# Altium PCB EMG_MainBoard_Layout.PcbDoc (part 4 of 7)
Units mm, origin at the board's own origin, x right, y up, seen from the top; angles counter-clockwise.
Board outline 59.1 x 36 mm, 6 copper layers (L1 TOP, L2 GND, L3 SIGNAL, L4 GND, L5 POWER SIGNAL, L6 BOTTOM), stack 1.146 mm thick; 231 components, 136 nets, 812 pads, 470 vias.
Unrouted connection lines stored in the file: 570.
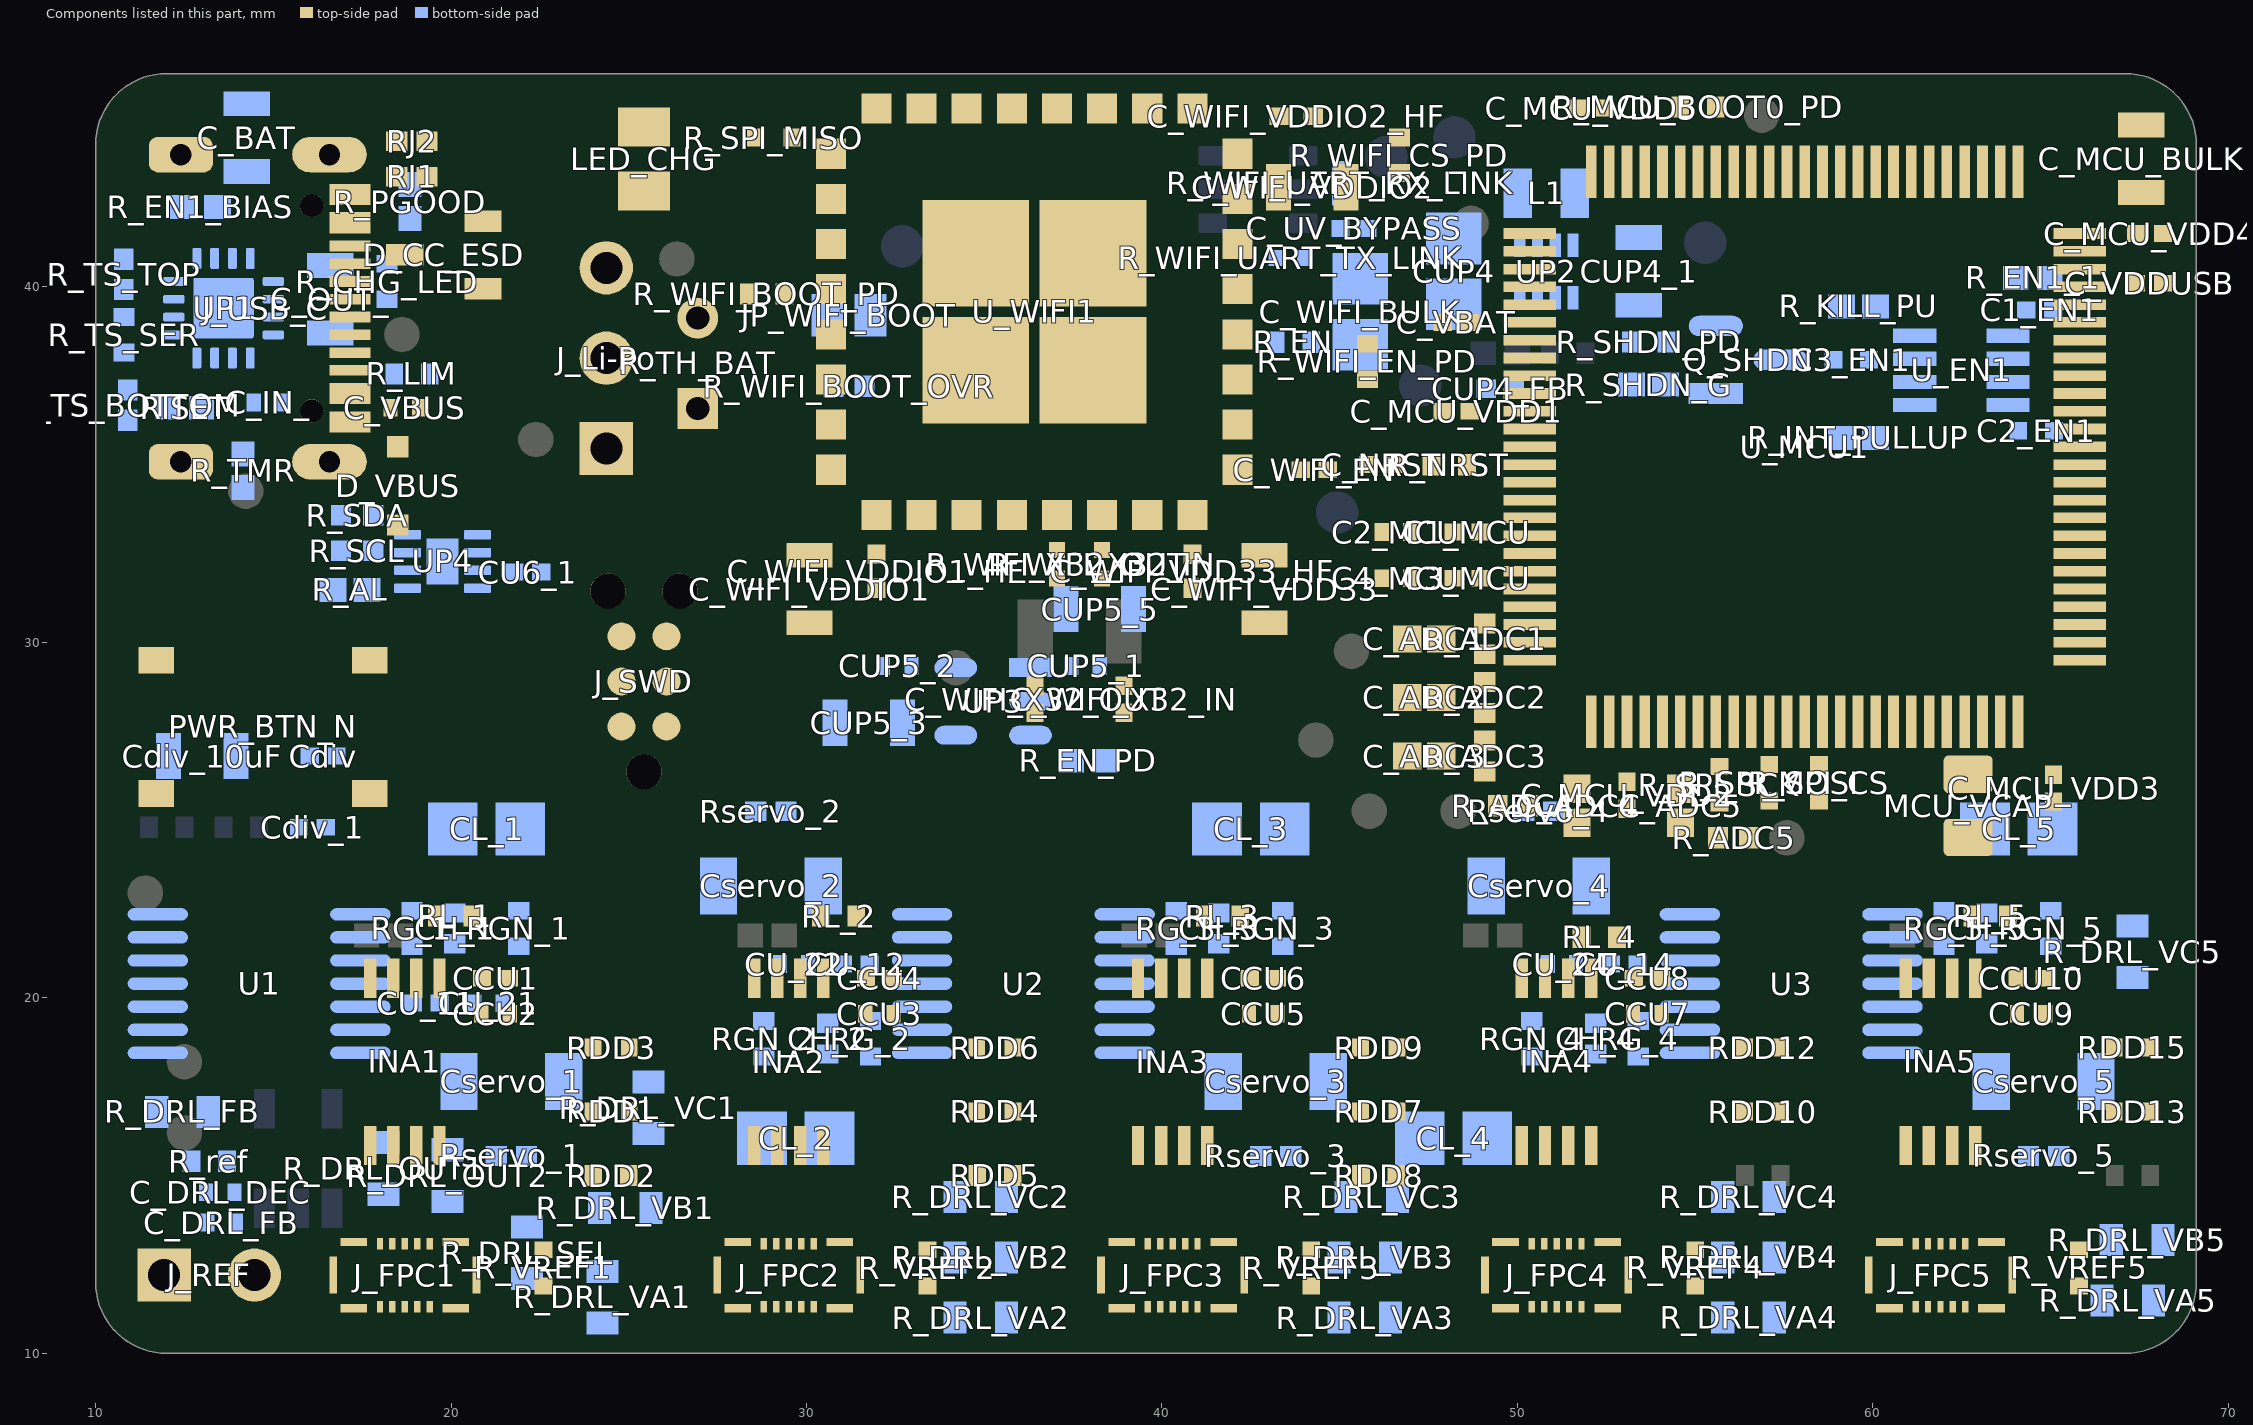
[diagram p6: the components of this part, seen from the top]

## Part data (continued)
RDD2: library part EMG_R5_RDD2, "-55℃~+155℃ 50V 5kΩ 63mW Thin Film Resistor ±0.1% ±25ppm/℃ 0402 Chip Resistor - Surface Mount ROH", LCSC Part=C5948099, Manufacturer="Viking Tech", Package=AR0402, Power Rating=0.0625W, Resistance=5KΩ, Temperature="-55°C to +155°C", Temperature Range High=+155°C, Temperature Range Low=-55°C, Tolerance=±0.1%, Voltage Rating=50V, Automotive=No, Automotive Grade="Grade 0", Category="Resistors/Chip Resistor - Surface Mount", ComponentLink2Description=Datasheet, ComponentLink2URL=https://www.viking.com.tw/Templates/att/Thin%20Film%20Resistor%20short%20form.pdf, Composition="Thin Film", Controlled Revision="R5 2026-09-16; project-local frozen symbol/footprint", Device Class L1="Passive Components", Device Class L2=Resistors, Device Class L3="Chip SMD Resistors", Footprint Url=https://www.viking.com.tw/Templates/att/Thin%20Film%20Resistor%20short%20form.pdf, Height=0.35mm, Ipc Land Pattern Name=RESC10050X32, Lead Free=Yes, Manufacturer Part Number=AR02BTC5001, Octopart=https://octopart.com/datasheet/viking-tech/AR02BTC5001, RoHS=TRUE, Series=AR
RDD3: library part EMG_R5_RDD3, Package=None, Availability=Unavailable, Controlled Revision="R5 2026-09-16; project-local frozen symbol/footprint", MP=ERA2ARB103X, Price=None
RDD4: library part EMG_R5_RDD4, Package=None, Availability=Unavailable, Controlled Revision="R5 2026-09-16; project-local frozen symbol/footprint", MP=ERA2ARB103X, Price=None
RDD5: library part EMG_R5_RDD5, "-55℃~+155℃ 50V 5kΩ 63mW Thin Film Resistor ±0.1% ±25ppm/℃ 0402 Chip Resistor - Surface Mount ROH", LCSC Part=C5948099, Manufacturer="Viking Tech", Package=AR0402, Power Rating=0.0625W, Resistance=5KΩ, Temperature="-55°C to +155°C", Temperature Range High=+155°C, Temperature Range Low=-55°C, Tolerance=±0.1%, Voltage Rating=50V, Automotive=No, Automotive Grade="Grade 0", Category="Resistors/Chip Resistor - Surface Mount", ComponentLink2Description=Datasheet, ComponentLink2URL=https://www.viking.com.tw/Templates/att/Thin%20Film%20Resistor%20short%20form.pdf, Composition="Thin Film", Controlled Revision="R5 2026-09-16; project-local frozen symbol/footprint", Device Class L1="Passive Components", Device Class L2=Resistors, Device Class L3="Chip SMD Resistors", Footprint Url=https://www.viking.com.tw/Templates/att/Thin%20Film%20Resistor%20short%20form.pdf, Height=0.35mm, Ipc Land Pattern Name=RESC10050X32, Lead Free=Yes, Manufacturer Part Number=AR02BTC5001, Octopart=https://octopart.com/datasheet/viking-tech/AR02BTC5001, RoHS=TRUE, Series=AR
RDD6: library part EMG_R5_RDD6, Package=None, Availability=Unavailable, Controlled Revision="R5 2026-09-16; project-local frozen symbol/footprint", MP=ERA2ARB103X, Price=None
RDD7: library part EMG_R5_RDD7, Package=None, Availability=Unavailable, Controlled Revision="R5 2026-09-16; project-local frozen symbol/footprint", MP=ERA2ARB103X, Price=None
RDD8: library part EMG_R5_RDD8, "-55℃~+155℃ 50V 5kΩ 63mW Thin Film Resistor ±0.1% ±25ppm/℃ 0402 Chip Resistor - Surface Mount ROH", LCSC Part=C5948099, Manufacturer="Viking Tech", Package=AR0402, Power Rating=0.0625W, Resistance=5KΩ, Temperature="-55°C to +155°C", Temperature Range High=+155°C, Temperature Range Low=-55°C, Tolerance=±0.1%, Voltage Rating=50V, Automotive=No, Automotive Grade="Grade 0", Category="Resistors/Chip Resistor - Surface Mount", ComponentLink2Description=Datasheet, ComponentLink2URL=https://www.viking.com.tw/Templates/att/Thin%20Film%20Resistor%20short%20form.pdf, Composition="Thin Film", Controlled Revision="R5 2026-09-16; project-local frozen symbol/footprint", Device Class L1="Passive Components", Device Class L2=Resistors, Device Class L3="Chip SMD Resistors", Footprint Url=https://www.viking.com.tw/Templates/att/Thin%20Film%20Resistor%20short%20form.pdf, Height=0.35mm, Ipc Land Pattern Name=RESC10050X32, Lead Free=Yes, Manufacturer Part Number=AR02BTC5001, Octopart=https://octopart.com/datasheet/viking-tech/AR02BTC5001, RoHS=TRUE, Series=AR
RDD9: library part EMG_R5_RDD9, Package=None, Availability=Unavailable, Controlled Revision="R5 2026-09-16; project-local frozen symbol/footprint", MP=ERA2ARB103X, Price=None
RDD10: library part EMG_R5_RDD10, Package=None, Availability=Unavailable, Controlled Revision="R5 2026-09-16; project-local frozen symbol/footprint", MP=ERA2ARB103X, Price=None